# Altium PCB gitarjadi.PCBDOC
Units mil, origin at the board's own origin, x right, y up, seen from the top; angles counter-clockwise.
Board outline 9670 x 5425 mil, 2 copper layers (Top Layer, Bottom Layer); 62 components, 44 nets, 204 pads, 5 vias.
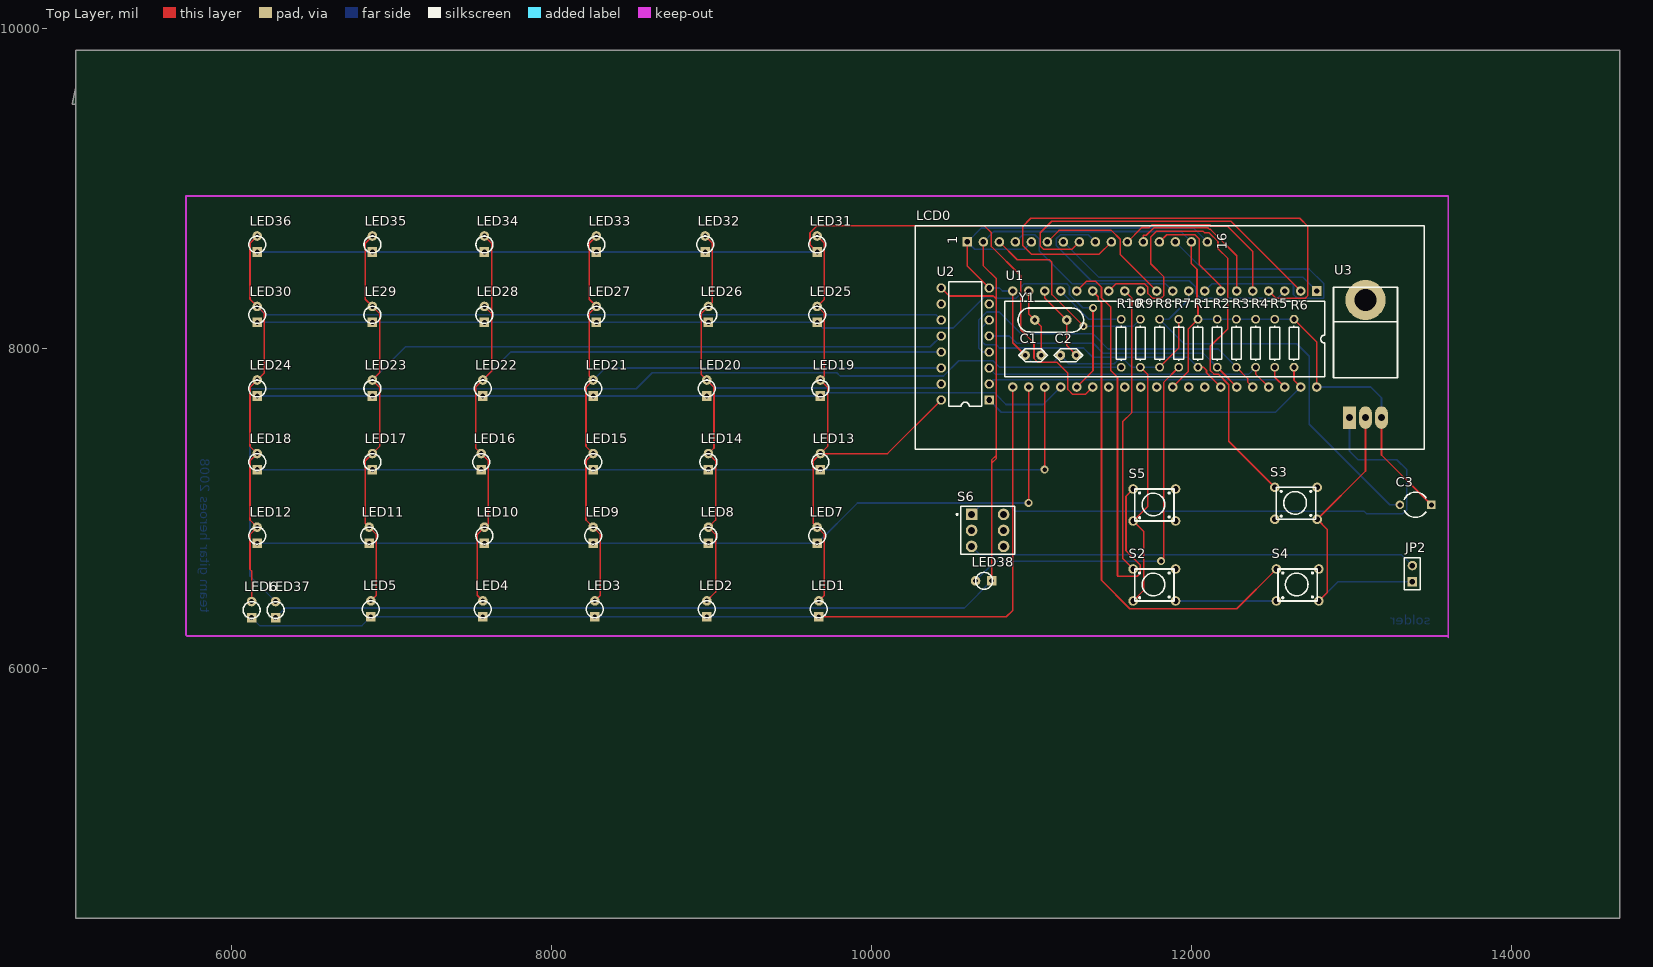
[diagram p0: Top Layer view]
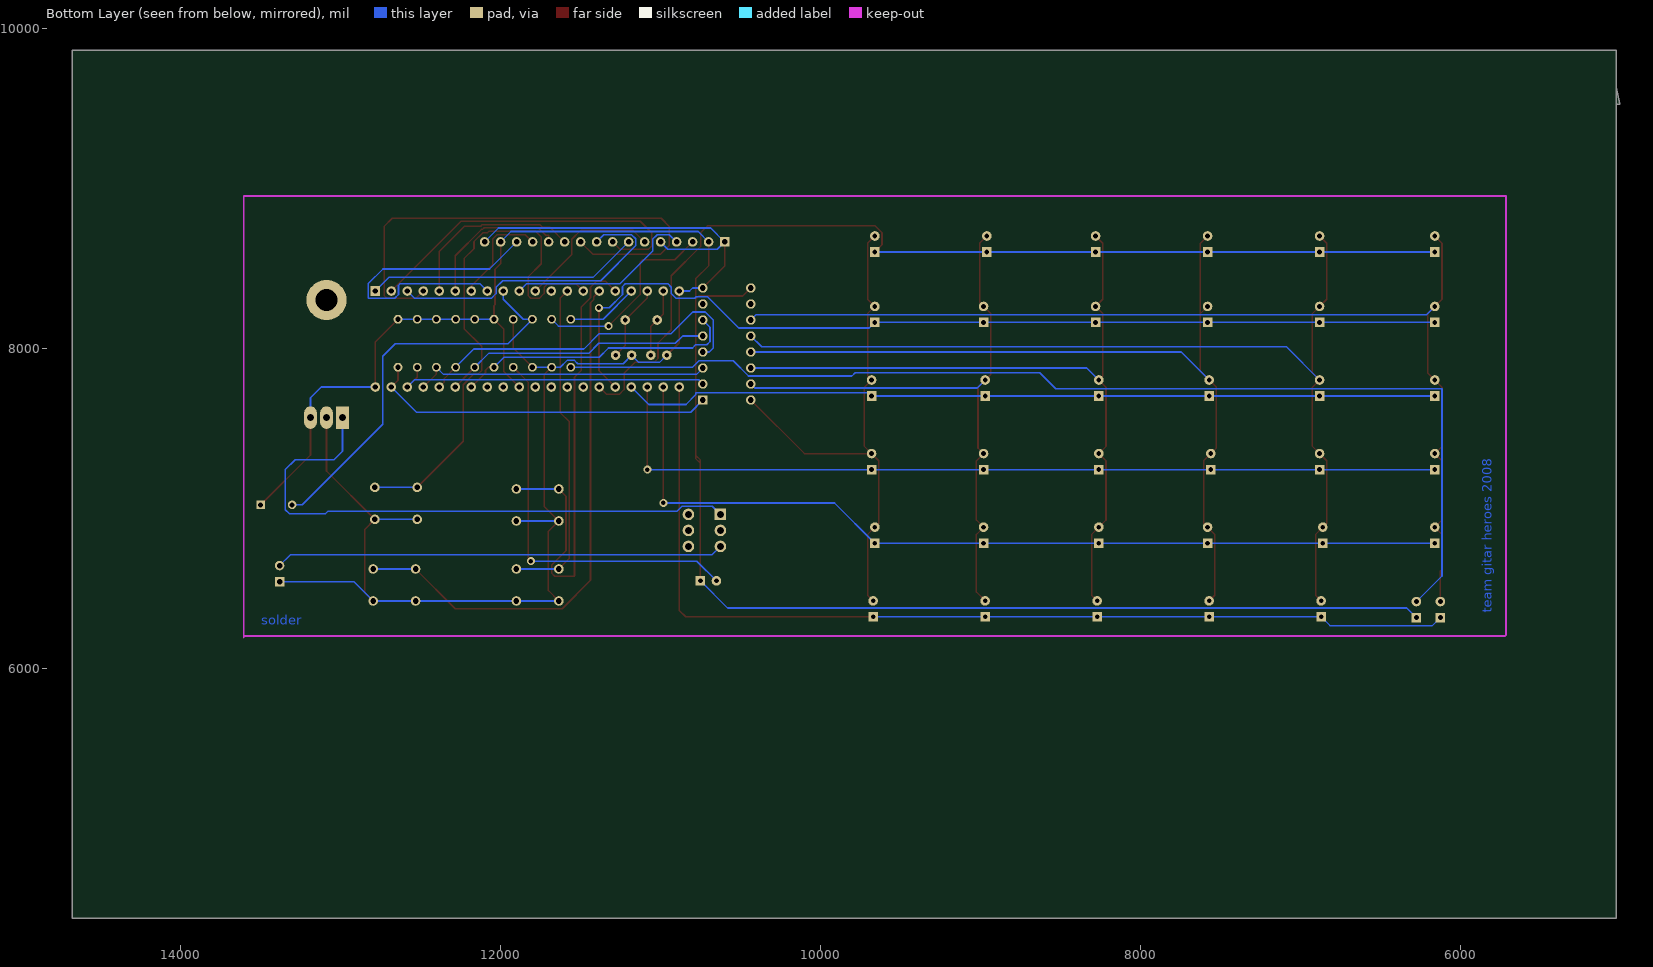
[diagram p1: Bottom Layer view, seen from below]

## Layer stack, top to bottom
Top Layer: signal copper 1.4
Dielectric: dielectric 12.6, FR-4, Dk 4.8
Bottom Layer: signal copper 1.4

## Board outline
5025,9630 5025,4435 14675,4435 14675,9860 5025,9860 5025,9525 5005,9525

## Design rules (kind name [scope] priority, off if disabled: settings)
Clearance [All] p1: gap=10
ComponentClearance [All] p1: gap=10 collisioncheckmode=0
PolygonConnect [All] p1: connectstyle=Relief reliefconductorwidth=10 reliefentries=4 polygonreliefangle="90 Angle"
RoutingVias [All] p1: holewidth=28 width=50 viastyle="Through Hole" minholewidth=28 minwidth=50 maxholewidth=28 maxwidth=50
SolderMaskExpansion [All] p1: expansion=4
TestPointUsage [All] p1: valid=0 allowmultiple=FALSE
Testpoint [All] p1: side=15 testpointundercomponent=TRUE minsize=40 maxsize=100 preferedsize=60 minholesize=0 maxholesize=40 preferedholesize=32 testpointgrid=1 style=1023 order=-539222988
Width [All] p1: maxlimit=10 minlimit=10 preferedwidth=10
17 further rules are at their usual default settings.

## Components (designator, comment, footprint, x,y, rotation, side; value= is the part's Value field where it differs from the comment)
C1 "cap 33pF" "cap 22/33uF" 11360,7955 r180 top
C2 "cap 33pF" "cap 22/33uF" 11580,7955 r180 top
C3 "Cap2" CAPR5-4X5 13400,7020 r180 top
JP2 "Header 2" HDR1X2 13380,6540 r90 top
LCD0 "LCD 16X2" "LCD 16X2" 13200,10820 r90 top
LE29 "LED kecil" "LED kecil" 6780,8260 r90 top
LED1 "LED kecil" "LED kecil" 9570,6420 r90 top
LED2 "LED kecil" "LED kecil" 8870,6420 r90 top
LED3 "LED kecil" "LED kecil" 8170,6420 r90 top
LED4 "LED kecil" "LED kecil" 7470,6420 r90 top
LED5 "LED kecil" "LED kecil" 6770,6420 r90 top
LED6 "LED kecil" "LED kecil" 6025,6415 r90 top
LED7 "LED kecil" "LED kecil" 9560,6880 r90 top
LED8 "LED kecil" "LED kecil" 8880,6880 r90 top
LED9 "LED kecil" "LED kecil" 8160,6880 r90 top
LED10 "LED kecil" "LED kecil" 7480,6880 r90 top
LED11 "LED kecil" "LED kecil" 6760,6880 r90 top
LED12 "LED kecil" "LED kecil" 6060,6880 r90 top
LED13 "LED kecil" "LED kecil" 9580,7340 r90 top
LED14 "LED kecil" "LED kecil" 8880,7340 r90 top
LED15 "LED kecil" "LED kecil" 8160,7340 r90 top
LED16 "LED kecil" "LED kecil" 7460,7340 r90 top
LED17 "LED kecil" "LED kecil" 6780,7340 r90 top
LED18 "LED kecil" "LED kecil" 6060,7340 r90 top
LED19 "LED kecil" "LED kecil" 9580,7800 r90 top
LED20 "LED kecil" "LED kecil" 8870,7800 r90 top
LED21 "LED kecil" "LED kecil" 8160,7800 r90 top
LED22 "LED kecil" "LED kecil" 7470,7800 r90 top
LED23 "LED kecil" "LED kecil" 6780,7800 r90 top
LED24 "LED kecil" "LED kecil" 6060,7800 r90 top
LED25 "LED kecil" "LED kecil" 9560,8260 r90 top
LED26 "LED kecil" "LED kecil" 8880,8260 r90 top
LED27 "LED kecil" "LED kecil" 8180,8260 r90 top
LED28 "LED kecil" "LED kecil" 7480,8260 r90 top
LED30 "LED kecil" "LED kecil" 6060,8260 r90 top
LED31 "LED kecil" "LED kecil" 9560,8700 r90 top
LED32 "LED kecil" "LED kecil" 8860,8700 r90 top
LED33 "LED kecil" "LED kecil" 8180,8700 r90 top
LED34 "LED kecil" "LED kecil" 7480,8700 r90 top
LED35 "LED kecil" "LED kecil" 6780,8700 r90 top
LED36 "LED kecil" "LED kecil" 6060,8700 r90 top
LED37 "LED kecil" "LED kecil" 6175,6415 r90 top
LED38 "LED kecil" "LED kecil" 10650,6445 r180 top
R1 "Res1" AXIAL-0.3 12040,8030 r270 top
R2 "Res1" AXIAL-0.3 12160,8030 r270 top
R3 "Res1" AXIAL-0.3 12280,8030 r270 top
R4 "Res1" AXIAL-0.3 12400,8030 r270 top
R5 "Res1" AXIAL-0.3 12520,8030 r270 top
R6 "Res1" AXIAL-0.3 12640,8030 r270 top
R7 "Res1" AXIAL-0.3 11920,8030 r270 top
R8 "Res1" AXIAL-0.3 11800,8030 r270 top
R9 "Res1" AXIAL-0.3 11680,8030 r270 top
R10 "Res1" AXIAL-0.3 11560,8030 r270 top
S2 "pushbutton" pushbutton 12200,6520 r0 top
S3 "pushbutton" pushbutton 13085,7030 r0 top
S4 "pushbutton" pushbutton 13095,6520 r0 top
S5 "pushbutton" pushbutton 12200,7020 r0 top
S6 "SW-DPDT" DPDT-6 10725,6860 r0 top
U1 "8051" "8051 40 pin" 11080,6610 r270 top
U2 "ULN2003A" A16 10585,8025 r90 top
U3 "7805" 78XX/79XX 12605,7805 r90 top
Y1 "XTAL" XTAL 11120,8075 r0 top

## Footprints (in the part's own frame and the unit in brackets; to place one, negate y for a bottom-side part, rotate by r counter-clockwise, add the part's x,y. Pads: shape width x height; smd on the part's side, far side on the other; paste and mask are expansions set on the pad)
78XX/79XX [mil]
  round 250 hole 140: 0(495,-482)
  rect 140x80 hole 42: 1(-240,-382)
  oval 140x80 hole 42: 2(-240,-482) 3(-240,-582)
  silkscreen extent 10,-682 575,-282
"8051 40 pin" [mil]
  rect 60x60 hole 33: 1(-1746,1702)
  round 60 hole 33: 2(-1746,1602) 3(-1746,1502) 4(-1746,1402) 5(-1746,1302) 6(-1746,1202) 7(-1746,1102) 8(-1746,1002) 9(-1746,902) 10(-1746,802) 11(-1746,702) 12(-1746,602) 13(-1746,502) 14(-1746,402) 15(-1746,302) 16(-1746,202) 17(-1746,102) 18(-1746,2) 19(-1746,-98) 20(-1746,-198) 21(-1146,-198) 22(-1146,-98) 23(-1146,2) 24(-1146,102) 25(-1146,202) 26(-1146,302) 27(-1146,402) 28(-1146,502) 29(-1146,602) 30(-1146,702) 31(-1146,802) 32(-1146,902) 33(-1146,1002) 34(-1146,1102) 35(-1146,1202) 36(-1146,1302) 37(-1146,1402) 38(-1146,1502) 39(-1146,1602) 40(-1146,1702)
  silkscreen extent -1681,-248 -1211,1752
A16 [mm] "DIP; 16 Leads; Row Spacing 7.62 mm; Pitch 2.54 mm"
  rect 1.5x1.5 hole 0.9: 1(-8.89,-3.81)
  round 1.5 hole 0.9: 2(-6.35,-3.81) 3(-3.81,-3.81) 4(-1.27,-3.81) 5(1.27,-3.81) 6(3.81,-3.81) 7(6.35,-3.81) 8(8.89,-3.81) 9(8.89,3.81) 10(6.35,3.81) 11(3.81,3.81) 12(1.27,3.81) 13(-1.27,3.81) 14(-3.81,3.81) 15(-6.35,3.81) 16(-8.89,3.81)
  silkscreen extent -9.85,-2.65 9.85,2.65
AXIAL-0.3 [mm]
  round 1.4 hole 0.85: 1(-3.81,0) 2(3.81,0)
  silkscreen extent -2.77,-0.76 2.77,0.76
"cap 22/33uF" [mil]
  round 60 hole 28: 1(300,0) 2(400,0)
  silkscreen extent 260,-40 440,40
CAPR5-4X5 [mm]
  rect 1.35x1.35 hole 0.8: 1(-2.5,0)
  round 1.35 hole 0.8: 2(2.5,0)
  silkscreen extent -1.69,-2 1.82,2
DPDT-6 [mm]
  rect 1.85x1.85 hole 1.1: 1(-2.54,2.54)
  round 1.85 hole 1.1: 2(-2.54,0) 3(-2.54,-2.54) 4(2.54,-2.54) 5(2.54,0) 6(2.54,2.54)
  silkscreen extent -4.96,-3.81 4.28,3.81
HDR1X2 [mm] "Connector; Header; 2 Position"
  rect 1.5x1.5 hole 0.9: 1(0,0)
  round 1.5 hole 0.9: 2(2.54,0)
  silkscreen extent -1.27,-1.27 3.81,1.27
"LCD 16X2" [mil]
  rect 60x60 hole 35: 1(-2157,2601)
  round 60 hole 35: 2(-2157,2501) 3(-2157,2401) 4(-2157,2301) 5(-2157,2201) 6(-2157,2101) 7(-2157,2001) 8(-2157,1901) 9(-2157,1801) 10(-2157,1701) 11(-2157,1601) 12(-2157,1501) 13(-2157,1401) 14(-2157,1301) 15(-2157,1201) 16(-2157,1101)
  silkscreen extent -3452,-254 -2057,2926
"LED kecil" [mil]
  rect 60x60 hole 30: 1(-100,-100)
  round 60 hole 30: 2(0,-100)
  silkscreen extent -106,-153 0,-47
pushbutton [mil]
  round 60 hole 35: 1(-565,-101) 1(-300,-101) 2(-565,99) 2(-300,99)
  silkscreen extent -555,-101 -310,99
XTAL [mil]
  round 60 hole 30: 1(-100,100) 2(100,100)
  silkscreen extent -205,25 205,175

## Part data
C1 C2: library part "cap 22/33uF"
C3: "Capacitor"
JP2: "Header, 2-Pin"
R1 R2 R3 R4 R5 R6 R7 R8 R9 R10: "Resistor"
S6: "Double-Pole, Double-Throw Switch"
U1: library part "8051 40 pin"
U2: "High-Voltage, High-Current Darlington Array"
U3: library part 7805/7809/7812/7905/7909/7912

## Via types
v1: diameter 50, hole 28, Top Layer to Bottom Layer, 5 vias

## Nets (pads, with @x,y where several pads share a name; then routed paths per layer and width w, separated by ;. In a path a pad name is that pad's centre, name@x,y a point inside that pad or via, vN(x,y) a via of type N, cw(c..) or ccw(c..) an arc to the next point about the centre after c; other vN are vias at no path point)
10: LCD0.7 U1.1 | length 1710.2
  Bottom Layer w10: LCD0.7 11421,8441 12697,8441 U1.1
11: LCD0.8 U1.2 | length 2193.3
  Top Layer w10: LCD0.8 11253,8617 11074,8617 11054,8637 11054,8720 11125.5,8791.5 12246.5,8791.5 U1.2
12: LCD0.9 U1.3 | length 1922.8
  Bottom Layer w10: LCD0.9 11354,8708 11180,8708 11154,8682 11154,8640 11373,8421 11986,8421 12027,8380 12027,8340 12056,8311 12537,8311 U1.3
13: LCD0.10 U1.4 | length 3256.8
  Top Layer w10: LCD0.10 11423,8587 10997,8587 10944,8640 10944,8760 10995.5,8811.5 12675.5,8811.5 12727,8760 12727,8328 12710,8311 12527,8311 U1.4
14: LCD0.11 U1.5 | length 1144.7
  Top Layer w10: LCD0.11 11689,8753 11735.45,8753 11753.95,8771.5 12113,8771.5 12123.47,8761.03 12223.91,8761.03 12382,8602.94 U1.5
15: LCD0.12 U1.6 | length 937
  Top Layer w10: LCD0.12 11699,8704 11717,8704 11764.5,8751.5 12101,8751.5 12111.5,8741 12118,8741 12282,8577 U1.6
16: LCD0.13 U1.7 | length 659.3
  Top Layer w10: LCD0.13 11844,8708 12021,8708 12049,8680 12049,8520 12182,8387 U1.7
17: LCD0.14 U1.8 | length 1960.8
  Bottom Layer w10: LCD0.14 12068,8494 12734,8494 12827,8401 12827,8311 12660,8311 12637,8334 12637,8391 12627,8401 12127,8401 U1.8
30: LCD0.4 U1.10 | length 1191.4
  Bottom Layer w10: LCD0.4 10944,8708 11020,8708 11049,8679 11049,8604 11252,8401 11837,8401 U1.10
31: LCD0.6 U1.11 | length 926
  Top Layer w10: LCD0.6 11171,8735 11499,8735 11554,8680 11554,8584 U1.11
32: U1.12
33: S2.2 U1.13 | length 2071.2
  Top Layer w10: U1.13 11627,8311 11627,7597 11570,7540 11570,6684 S2.2@11635,6619
  Bottom Layer w10: S2.2@11635,6619 S2.2@11900,6619
34: S3.2 U1.14 | length 3347.8
  Top Layer w10: U1.14 11527,8401 11706,8401 11727,8380 11727,8340 11756,8311 11810,8311 11827,8328 11827,8444 11744,8527 11744,8694 11778.52,8728.52 12073.91,8728.52 12081.6,8720.83 12109.17,8720.83 12164.75,8665.25 12164.75,8621.08 12227,8558.83 12227,8121 12117,8011 12117,7860 12140,7837 12166,7837 12232,7771 12232,7417 S3.2@12520,7129
  Bottom Layer w10: S3.2@12520,7129 S3.2@12785,7129
35: S4.2 U1.15 | length 3364.8
  Top Layer w10: U1.15 11417,8321 11417,8302.68 11437,8282.68 11437,6548 11614,6371 12282,6371 S4.2@12530,6619
  Bottom Layer w10: S4.2@12530,6619 S4.2@12795,6619
36: S5.2 U1.16 | length 3038.2
  Top Layer w10: U1.16 11342,8416 11401,8416 11437,8380 11437,8314 11495,8256 11495,7859 11537,7817 11537,6576 11539,6574 11660,6574 11680,6594 11680,6642 11590,6732 11590,7074 S5.2@11635,7119
  Bottom Layer w10: S5.2@11635,7119 S5.2@11900,7119
37: R10.1 U1.17 | length 450.9
  Bottom Layer w10: U1.17 11358,8180 R10.1
B1: R6.2 U1.39 U2.1 | length 2184.9
  Top Layer w10: R6.2 12640,7798 U1.39
  Bottom Layer w10: U2.1 10811,7599 12525,7599 U1.39
B2: R5.2 U1.38 U2.2 | length 2026.1
  Top Layer w10: R5.2 12520,7818 U1.38
  Bottom Layer w10: U2.2 10761,7801 12537,7801 U1.38
B3: R4.2 U1.37 U2.3 | length 1858.2
  Top Layer w10: R4.2 12400,7838 U1.37
  Bottom Layer w10: U2.3 10775,7835 12355,7835 R4.2
B4: R3.2 U1.36 U2.4 | length 2190.2
  Top Layer w10: R3.2 12350,7810 12350,7788 U1.36
  Bottom Layer w10: U2.4 10695,7975 10670,8000 10670,8175 10720,8225 10797,8225 10932,8090 11382,8090 11478,7994 12166,7994 R3.2
B5: R2.2 U1.35 U2.5 | length 1680.3
  Top Layer w10: R2.2 12232,7808 12232,7806 U1.35
  Bottom Layer w10: U2.5 10861,8075 10907,8029 11385,8029 11448,7966 12074,7966 R2.2
B6: R1.2 U1.34 U2.6 | length 1772.6
  Top Layer w10: R1.2 12074,7880 12092.95,7861.05 12092.95,7845.05 U1.34
  Bottom Layer w10: U2.6 10690,8130 10690,8040 10710.47,8019.53 10780,8019.53 10799.53,8000 11325,8000 11382.44,7942.56 11977.44,7942.56 R1.2
G1: LED1.2 LED7.2 LED13.2 LED19.2 LED25.2 LED31.2 U2.16 | length 3339.4
  Top Layer w10: LED31.2 9705,8655 9705,8305 LED25.2 9705,8215 9705,7825 LED19.2 9725,7755 9725,7385 LED13.2 ; LED1.2 9705,6455 9705,6835 LED7.2 9635,6905 9635,7295 LED13.2 ; U2.16 10100,7340 LED13.2
G2: LED2.2 LED8.2 LED14.2 LED20.2 LED26.2 LED32.2 U2.15 | length 3950
  Top Layer w10: LED32.2 9005,8655 9005,8285 LED26.2 8935,8215 8935,7835 LED20.2 9015,7755 9015,7375 LED14.2 9025,7295 9025,6925 LED8.2 9025,6835 9025,6475 LED2.2
  Bottom Layer w10: LED20.2 9020,7750 10410,7750 U2.15
G3: LED3.2 LED9.2 LED15.2 LED21.2 LED27.2 LED33.2 U2.14 | length 4660
  Top Layer w10: LED3.2 8305,6455 8305,6835 LED9.2 8215,6925 8215,7295 LED15.2 8215,7385 8215,7755 LED21.2 8235,7825 8235,8215 LED27.2 8235,8305 8235,8655 LED33.2
  Bottom Layer w10: LED21.2 8335,7875 U2.14
G4: LED4.2 LED10.2 LED16.2 LED22.2 LED28.2 LED34.2 U2.13 | length 5417.8
  Top Layer w10: LED4.2 7535,6455 7535,6835 LED10.2 7605,6905 7605,7295 LED16.2 7525,7375 7525,7755 LED22.2 7625,7855 7625,8215 ; LED28.2 7625,8215 ; LED34.2 7625,8655 7625,8215
  Bottom Layer w10: LED22.2 7745,7975 U2.13
G5: LE29.2 LED5.2 LED11.2 LED17.2 LED23.2 LED35.2 U2.12 | length 6122.9
  Top Layer w10: LED5.2 6905,6455 6905,6835 LED11.2 6835,6905 6835,7295 LED17.2 6925,7385 6925,7755 LED23.2 6925,7845 6925,8215 LE29.2 6835,8305 6835,8655 LED35.2
  Bottom Layer w10: LED23.2 7087,8007 10367,8007 U2.12
G6: LED6.2 LED12.2 LED18.2 LED24.2 LED30.2 LED36.2 U2.11 | length 6767.1
  Top Layer w10: LED6.2 6125,6606 6115,6616 6115,6835 LED12.2 6115,6925 6115,7295 LED18.2 6115,7385 6115,7755 LED24.2 6205,7845 6205,8215 LED30.2 6115,8305 6115,8655 LED36.2
  Bottom Layer w10: LED30.2 6211,8209 10401,8209 U2.11
GND: C1.2 C2.2 JP2.1 LCD0.1 LCD0.5 LCD0.16 R7.1 R8.2 R9.2 S2.1 S3.1 S4.1 S5.1 U1.20 U2.8 U3.2 | length 9433.6
  Top Layer w10: LCD0.1 10599,8511 U2.8 ; U1.20 10882,8033 C1.2 ; S2.1@11635,6419 11700,6484 11700,6854 11635,6919 11727,7011 11727,7833 R9.2 ; R8.2 11920,8000 R7.1 ; S4.1@12795,6419 12848,6472 12848,6866 12785,6929 13087,7231 U3.2
  Bottom Layer w10: U2.8 10799,8375 10818,8356 U1.20 ; C1.2 11005,7910 11135,7910 C2.2 11233,7902 11516,7902 11536.56,7922.56 11583.44,7922.56 11626,7880 R9.2 R8.2 ; LCD0.5 10954,8618 10644,8618 LCD0.1 10686,8750 12012,8750 LCD0.16 ; S2.1@11635,6419 11900,6419 12530,6419 12795,6419 12916,6540 JP2.1 ; S5.1@11635,6919 S5.1@11900,6919 ; S3.1@12520,6929 S3.1@12785,6929
NetC1_1: C1.1 U1.19 Y1.1 | length 433.3
  Top Layer w10: U1.19 10982,8213 Y1.1 11060,8135 C1.1
NetC2_1: C2.1 U1.18 Y1.2 | length 483
  Top Layer w10: U1.18 11082,8313 Y1.2 11220,8015 C2.1
NetC3_2: C3.2 R8.1 U1.9 | length 2515.8
  Bottom Layer w10: U1.9 11982,8305 11857,8180 R8.1 11953,8027 12657,8027 12735,7949 12735,7524 13239,7020 C3.2
NetJP2_2: JP2.2 S6.3 | length 2804.7
  Bottom Layer w10: S6.3 10677,6708 13312,6708 JP2.2
NetLCD0_3: LCD0.3 R9.1 | length 1235
  Top Layer w10: LCD0.3 10910.85,8551.15 11111.85,8551.15 11127,8536 11127,8334 v1(11324,8137)
  Bottom Layer w10: v1(11324,8137) 11637,8137 R9.1
NetLED37_2: LED37.2 R10.2 | length 6946.9
  Bottom Layer w10: LED37.2 6115,6575 6115,7745 8529,7745 8629,7845 9783,7845 9803,7825 10450,7825 10545,7920 10759,7920 10799,7880 R10.2
NetLED38_2: LED38.2 R7.2 | length 2468.5
  Top Layer w10: v1(11810,6668) 11827,6685 11827,7787 R7.2
  Bottom Layer w10: LED38.2 10773,6668 v1(11810,6668)
NetS6_1: S6.1 U3.1 | length 3635.7
  Bottom Layer w10: S6.1 10676.42,7011.42 10864.58,7011.42 10896,6980 13078,6980 13093,6965 13320,6965 13344,6989 13344,7240 13283,7301 13040,7301 12987,7354 U3.1
R1: LED1.1 LED2.1 LED3.1 LED4.1 LED5.1 LED6.1 U1.21 | length 6213.1
  Top Layer w10: LED1.1 10842,6320 10882,6360 U1.21
  Bottom Layer w10: LED6.1 6175,6265 6815,6265 LED5.1 LED4.1 LED3.1 LED2.1 LED1.1
R2: LED7.1 LED8.1 LED9.1 LED10.1 LED11.1 LED12.1 U1.22 | length 5650.7
  Top Layer w10: v1(10982,7031.42) U1.22
  Bottom Layer w10: LED12.1 LED11.1 LED10.1 LED9.1 LED8.1 LED7.1 9911.42,7031.42 v1(10982,7031.42)
R3: LED13.1 LED14.1 LED15.1 LED16.1 LED17.1 LED18.1 U1.23 | length 5438
  Top Layer w10: v1(11082,7240) U1.23
  Bottom Layer w10: LED18.1 LED17.1 LED16.1 LED15.1 LED14.1 LED13.1 v1(11082,7240)
R4: LED19.1 LED20.1 LED21.1 LED22.1 LED23.1 LED24.1 U1.24 | length 5125
  Bottom Layer w10: LED24.1 LED23.1 LED22.1 LED21.1 LED20.1 LED19.1 9680,7720 10780,7720 10780,7707 10840,7647 11073,7647 U1.24
R5: LE29.1 LED25.1 LED26.1 LED27.1 LED28.1 LED30.1 U1.25 | length 6012.4
  Top Layer w10: U1.25 11384,7858 v1(11384,8251)
  Bottom Layer w10: LED30.1 LE29.1 LED28.1 LED27.1 LED26.1 LED25.1 9695,8125 10511,8125 10706,8320 10776,8320 10785,8311 10903,8311 10932,8340 10932,8380 10953,8401 11220,8401 11237,8384 11237,8334 11320,8251 v1(11384,8251)
R6: LED31.1 LED32.1 LED33.1 LED34.1 LED35.1 LED36.1 U1.26 | length 6242.2
  Top Layer w10: LED31.1 9615,8645 9615,8720 9658,8763 10706,8763 10749,8720 10749,8634 10932,8451 10932,8114 11015,8031 11015,7935 11040,7910 11160,7910 11227,7843 11227,7740 11256,7711 11337,7711 U1.26
  Bottom Layer w10: LED36.1 LED35.1 LED34.1 LED33.1 LED32.1 LED31.1
VCC: C3.1 LCD0.2 LCD0.15 LED37.1 LED38.1 R1.1 R2.1 R3.1 R4.1 R5.1 R6.1 U1.31 U1.40 U2.9 U3.3 | length 11828.5
  Top Layer w10: U2.9 10485,8325 10760,8325 10780,8305 ; LCD0.2 10699,8513 10780,8432 10780,8305 ; LED38.1 10750,7279 ; U1.31 11980,7854 11980,8120 R1.1 12040,8265 12034,8271 12034,8492 11999,8527 LCD0.15 ; R6.1 12782,8038 U1.40 ; U3.3 13187,7331.43 C3.1 ; 10750,7279 10780,7309 10780,7330 ; 10750,7279 10750,7300 10780,7330 ; 10780,7330 10780,8305
  Bottom Layer w10: LED37.1 6335,6375 10580,6375 LED38.1 ; LCD0.2 10764,8728 11934,8728 LCD0.15 ; R1.1 R2.1 R3.1 R4.1 R5.1 R6.1 ; U1.40 13120,7756 13187,7689 U3.3
pads on no net: S6.2 S6.4 S6.5 S6.6 U1.27 U1.28 U1.29 U1.30 U1.32 U1.33 U2.7 U2.10 U3.0

## Keep-outs
Keep-Out Layer:
  lines w10: 13605,6190 13605,8950 5715,8950 5715,6205 5720,6200 13605,6200

## Other copper
Bottom Layer:
  text "team gitar heroes 2008" at 5805,6345 h60 r270
  text "solder" at 13495,6270 h60

## Text inside footprints (layer, text, board x,y; h text height)
LCD0: Top Overlay "1" at 10534,8648 h60 r90; Top Overlay "16" at 12219,8613 h60 r90